# Allegro board PCB.brd
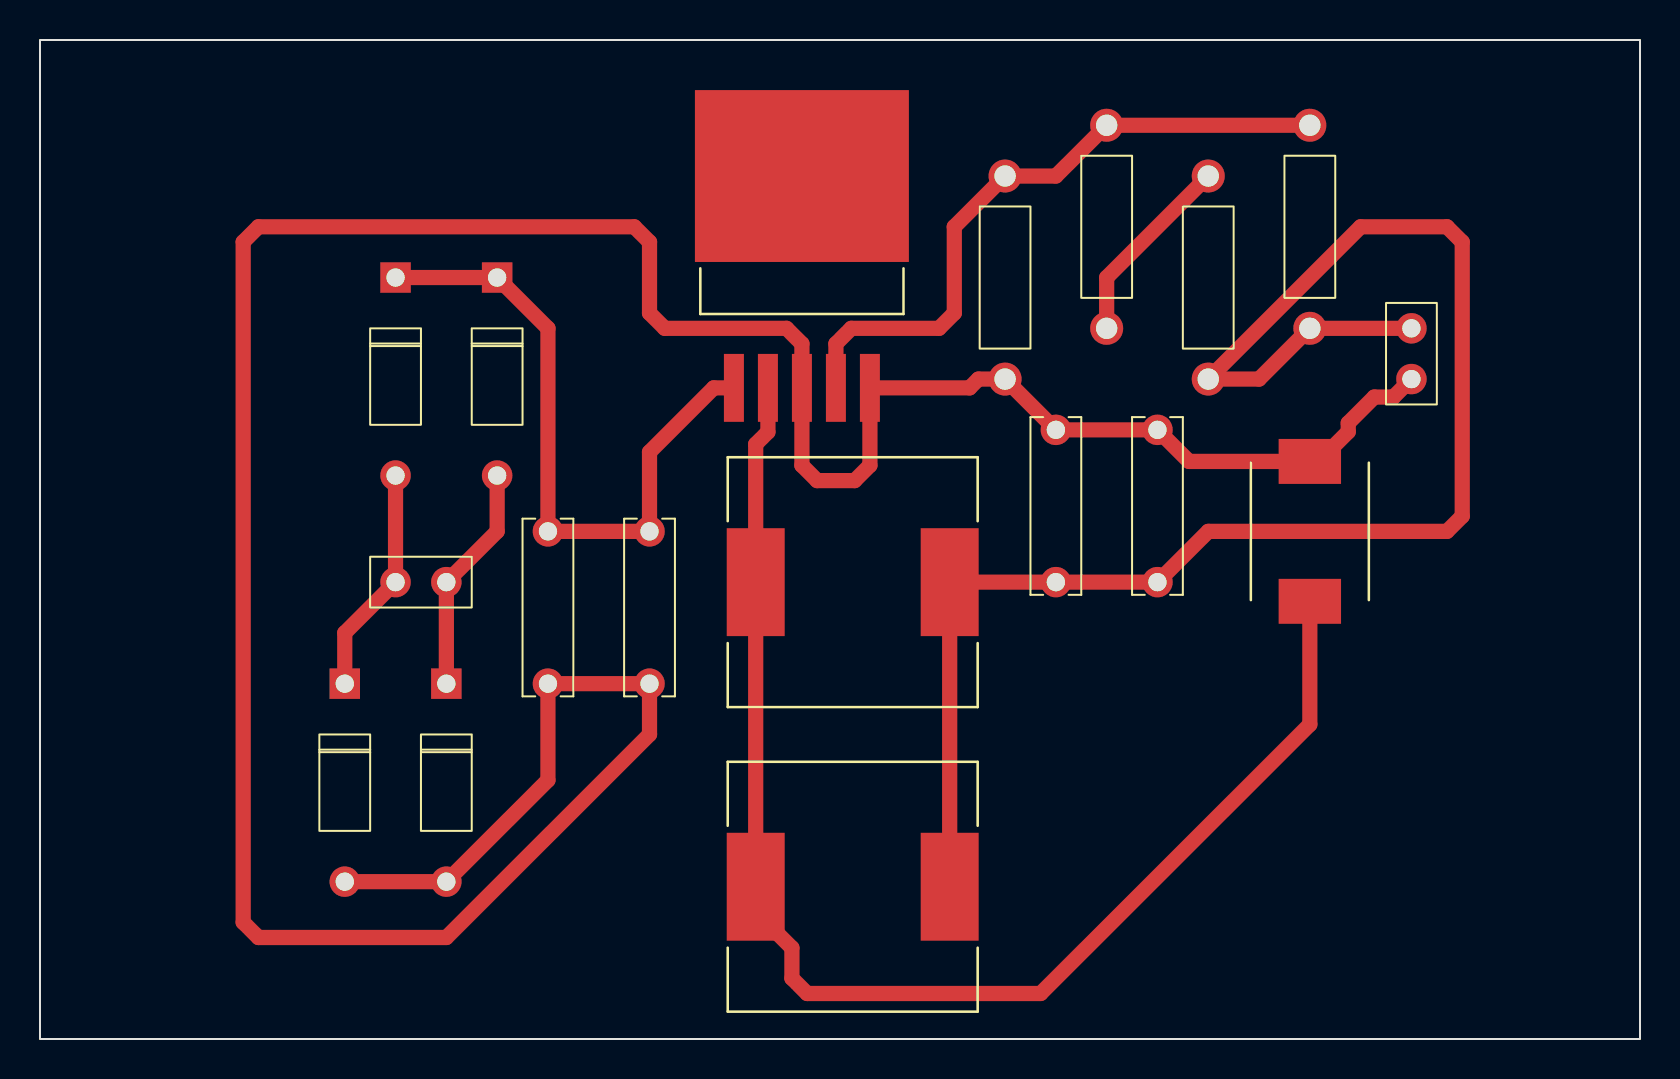
[diagram p0: board, top side]
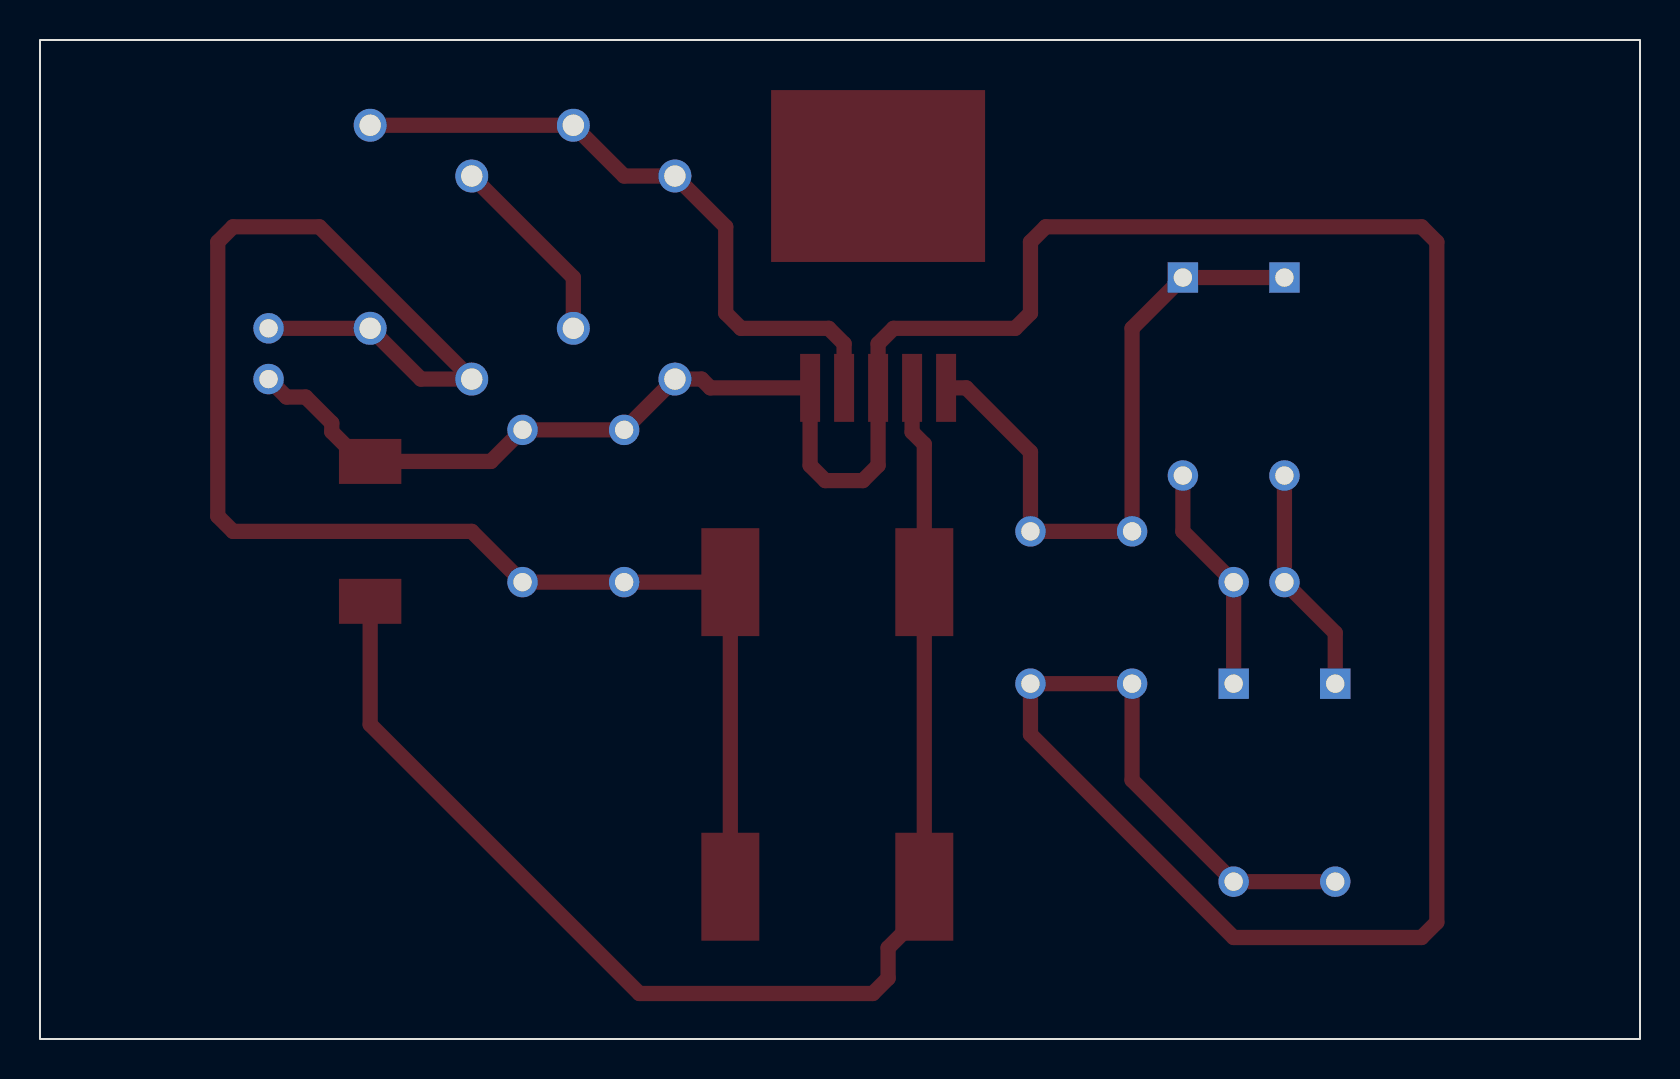
[diagram p1: board, bottom side, seen from below]

Outline 80.01 x 49.99 mm; copper layers: TOP, BOTTOM. Coordinates in mm from the lower left corner of the outline.
Outline path: rectangle 0,0 80.01,49.99

## Design rules (mm)
constraint set DEFAULT: min track width 0.127

## Placement (name value [footprint] x y rotation side)
C1  CAPACITOR  [CAP300]  30.48 25.4 270 top
C2  CAPACITOR  [CAP300]  25.4 25.4 270 top
C3  CAPACITOR  [CAP300]  55.88 22.86 90 top
C4  CAPACITOR  [CAP300]  50.8 22.86 90 top
D1  DIODE  [DO41]  17.78 38.1 180 top
D2  DIODE  [DO41]  22.86 38.1 180 top
D3  DIODE  [DO41]  15.24 17.78 180 top
D4  DIODE  [DO41]  20.32 17.78 180 top
D5  MBRS340T3  [DIOM7959X261N]  63.5 25.4 90 top
J1  HEADER 2  [JUMPER2]  17.78 22.86 0 top
J2  HEADER 2  [JUMPER2]  68.58 35.56 270 top
L1  INDUCTOR  [INDP125125X600N]  40.64 22.86 0 top
L2  INDUCTOR  [INDP125125X600N]  40.64 7.62 0 top
R1  RESISTOR  [RES400]  48.26 33.02 0 top
R2  RESISTOR  [RES400]  53.34 45.72 180 top
R3  RESISTOR  [RES400]  58.42 43.18 180 top
R4  RESISTOR  [RES400]  63.5 45.72 180 top
U1  LM2576-12BT  [VREG_TPS79625KTTR]  38.1 43.18 90 top

## Library data of the parts
C1-C4 = CAPACITOR
D1-D4 = DIODE
D5 = MBRS340T3
J1 J2 = HEADER 2
L1 L2 = INDUCTOR
R1-R4 = RESISTOR
U1 = LM2576-12BT_1

## Footprints (pads in the part's own frame, mm; a bottom-side part is the same pattern mirrored in y, then rotated)
CAP300
  round 1.524 hole 0.914: 1(0,0) 2(7.62,0)
DIOM7959X261N
  rect 2.25x3.12 smd: 1(-3.5,0) 2(3.5,0)
DO41
  rect 1.524x1.524 hole 0.914: 1(0,0)
  round 1.524 hole 0.914: 2(0,9.906)
INDP125125X600N
  rect 2.9x5.4 smd: 1(-4.85,0) 2(4.85,0)
JUMPER2
  round 1.524 hole 0.914: 1(0,0) 2(2.54,0)
RES400
  round 1.651 hole 1.067: 1(0,0) 2(0,10.16)
VREG_TPS79625KTTR
  rect 8.6x10.7 smd: (0,0)
  rect 3.4x1 smd: 1(-10.6,3.4) 2(-10.6,1.7) 3(-10.6,0) 4(-10.6,-1.7) 5(-10.6,-3.4)

## Nets
0: C1.2 C2.2 C3.2 C4.2 D3.2 D4.2 D5.2 J2.2 R1.1 U1.3 U1.5
N00544: D1.2 D3.1(K) J1.1
N00551: C1.1 C2.1 D1.1(K) D2.1(K) U1.1(VIN)
N00655: D2.2 D4.1(K) J1.2
N00719: D5.1(C) L1.1 L2.1 U1.2
N00723: C3.1 C4.1 J2.1 L1.2 L2.2 R3.2 R4.2
N00934: R1.2 R2.1 R4.1 U1.4
N00988: R2.2 R3.1

## Routing (per net, layer and track width the routed paths; a pad name or vN(x,y) marks a point on that pad's centre or on a via; arc(x,y) is an arc through that point)
0: length 161.3
  TOP w0.762: D3.2 D4.2 25.4,12.95 C2.2 C1.2 30.48,15.24 20.32,5.08 10.92,5.08 10.16,5.84 10.16,39.88 10.92,40.64 29.72,40.64 30.48,39.88 30.48,36.32 31.24,35.56 37.33,35.56 38.1,34.79 U1.3 38.1,28.7 38.86,27.94 40.74,27.94 41.5,28.7 U1.5 46.49,32.58 46.93,33.02 R1.1 C4.2 C3.2 57.46,28.9 D5.2 63.94,28.9 65.42,30.38 65.42,30.82 66.72,32.12 67.68,32.12 J2.2
N00544: length 11.5
  TOP w0.762: D3.1 15.24,20.32 J1.1 D1.2
N00551: length 33.4
  TOP w0.762: U1.1 33.69,32.58 30.48,29.37 C1.1 C2.1 25.4,35.56 D2.1 D1.1
N00655: length 11.5
  TOP w0.762: D4.1 J1.2 22.86,25.4 D2.2
N00719: length 68.5
  TOP w0.762: U1.2 36.4,30.37 35.79,29.76 L1.1 L2.1 35.79,6.37 37.6,4.56 37.6,3.04 38.36,2.28 50.04,2.28 63.5,15.74 D5.1
N00723: length 83.3
  TOP w0.762: L2.2 L1.2 C4.1 C3.1 58.42,25.4 70.36,25.4 71.12,26.16 71.12,39.88 70.36,40.64 66.04,40.64 R3.2 60.96,33.02 R4.2 J2.1
N00934: length 33
  TOP w0.762: R4.1 R2.1 50.8,43.18 R1.2 45.72,40.64 45.72,36.32 44.96,35.56 40.57,35.56 39.8,34.79 U1.4
N00988: length 9.7
  TOP w0.762: R3.1 53.34,38.1 R2.2

## Text on the board
NCLEGEND-1-2: FIGURE | FINISHED_SIZE | 36.0 | 42.0 | DRILL CHART: TOP to BOTTOM | ALL UNITS ARE IN MILS | PLATED | QTY | 20 | 8
